# Altium PCB PCB1.PcbDoc
Units mil, origin at the board's own origin, x right, y up, seen from the top; angles counter-clockwise.
Board outline 6000 x 4000 mil, 2 copper layers (Top Layer, Bottom Layer); 10 components, 6 nets, 22 pads, 0 vias.
Unrouted connection lines stored in the file: 4.
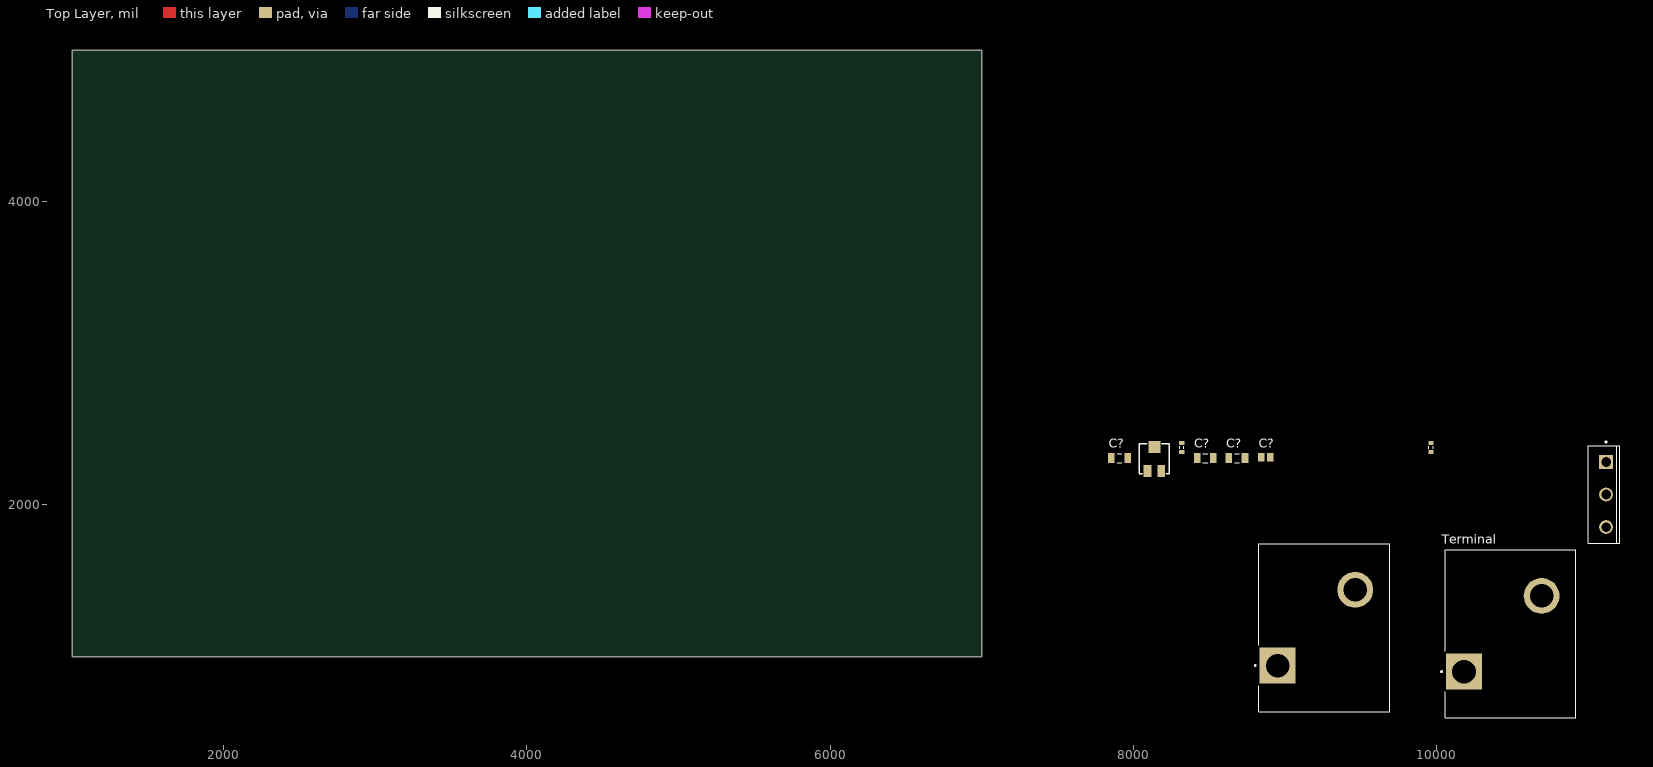
[diagram p0: Top Layer view]
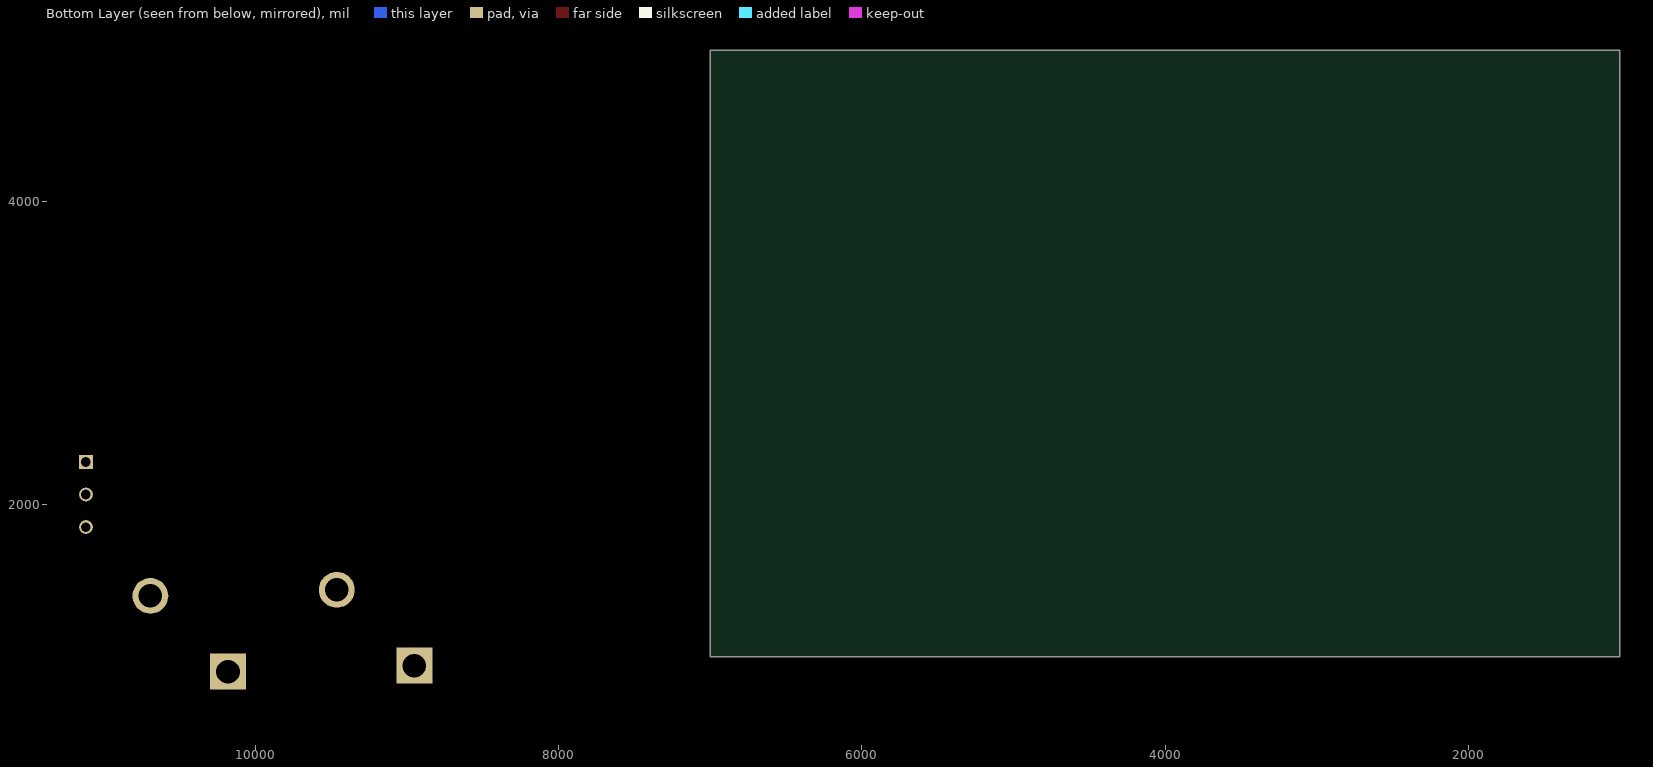
[diagram p1: Bottom Layer view, seen from below]

## Layer stack, top to bottom
Top Solder: solder mask 0.4, Solder Resist, Dk 3.5
Top Layer: signal copper 1.4
Dielectric 1: dielectric 12.6, FR-4, Dk 4.8
Bottom Layer: signal copper 1.4
Bottom Solder: solder mask 0.4, Solder Resist, Dk 3.5

## Board outline
1000,1000 7000,1000 7000,5000 1000,5000

## Design rules (kind name [scope] priority, off if disabled: settings)
Clearance [All] p1: gap=10 ignorepadtopadclearanceinfootprint=FALSE except(0: Arc-Hole Track-Hole SMDPad-Hole THPad-Hole Via-Hole Fill-Hole Poly-Hole Region-Hole Text-Hole)
PolygonConnect [All] p1: connectstyle=Relief reliefconductorwidth=10 reliefentries=4 polygonreliefangle="90 Angle" airgapwidth=10
RoomDefinition Sheet1 [InComponentClass('Sheet1')] p1: confinementstyle=ConfineIn formatcopy=TRUE lockcomponents=FALSE outline 7819.72,1213.74 11229.72,1213.74 11229.72,2453.74 7819.72,2453.74
RoutingVias [All] p1: holewidth=28 width=50 viastyle="Through Hole" minholewidth=28 minwidth=50 maxholewidth=28 maxwidth=50
SolderMaskExpansion [All] p1: expansion=4
Width [All] p1: maxlimit=10 minlimit=10 preferedwidth=10
30 further rules are at their usual default settings.

## Components (designator, comment, footprint, x,y, rotation, side; value= is the part's Value field where it differs from the comment)
C? "Cap Pol3" C0805 8874.72,2313.74 r0 top value=100uF/50V
C? "Cap Semi" C1206 8474.72,2308.74 r0 top value=100uF
C? "Cap Semi" C1206 7909.72,2308.74 r0 top value=0.33uF
C? "Cap Semi" C1206 8684.72,2308.74 r0 top value=3300uF
Terminal "230V AC" FP-38969-0002-MFG 10490,1150 r90 top
? "2N3055" ONSC-TO-247-3-340L-02 11119.72,2068.74 r0 top
? "Output" FP-38969-0002-MFG 9260,1190 r90 top
? "5K POT" POT4MM-2 8139.72,2303.74 r90 top
? "" J1-0603 9964.72,2378.74 r90 top value=10ohm
? "" J1-0603 8319.72,2378.74 r90 top value=220ohm

## Footprints (in the part's own frame and the unit in brackets; to place one, negate y for a bottom-side part, rotate by r counter-clockwise, add the part's x,y. Pads: shape width x height; smd on the part's side, far side on the other; paste and mask are expansions set on the pad)
C0805 [mm] "Chip Capacitor, Body 2.0x1.3mm, IPC High Density"
  rect 1.1x1.4 smd: 1(-0.75,0) 2(0.75,0)
  body extent -1.1,-0.72 1.1,0.72, height 1.4
C1206 [mm] "Chip Capacitor, Body 3.2x1.6mm, IPC High Density"
  rect 1.1x1.7 smd: 1(-1.35,0) 2(1.35,0)
  silkscreen extent -0.4,-0.75 0.4,0.75, body extent -1.7,-0.9 1.7,0.9, height 1.3
FP-38969-0002-MFG [mm]
  rect 6.01x6.01 hole 3.96 paste-1000 mask+0: 1(-6.35,7.8)
  round 6.01 hole 3.96 paste-1000 mask+0: 2(6.35,-5.2)
  silkscreen extent -14.1,-10.95 14.1,11.67, body extent -14.2,-11.05 14.2,11.05, height 0.25
J1-0603 [mm] "Chip Resistor, Body 1.6x0.8mm, IPC High Density"
  rect 0.7x0.9 smd: 1(-0.75,0) 2(0.75,0)
  silkscreen extent -0.2,-0.35 0.2,0.35, body extent -0.85,-0.48 0.85,0.48, height 0.9
ONSC-TO-247-3-340L-02 [mm] "FM, 3-Leads, Body 16.3x5.3mm, Pitch 5.45mm"
  rect 2.3x2.3 hole 1.6: 1(0,5.45)
  round 2.3 hole 1.6: 2(0,0) 3(0,-5.45)
  silkscreen extent -3,-8.15 2.3,8.92, body extent -3,-8.15 2.3,8.15, height 25.58
POT4MM-2 [mm] "Square Trimming Potentiometer"
  rect 2x1.3 smd: CCW(-2,-1.15) CW(-2,1.15)
  rect 2x2 smd: W(2,0)
  silkscreen extent -2.5,-2.5 2.5,2.5

## Part data
C?: "Polarized Capacitor (Surface Mount)", LatestRevisionDate=29-May-2009, LatestRevisionNote="IPC-7351 Footprint Added.", PackageDescription="Chip Capacitor", PackageReference=C0805, Published=8-Jun-2000, Publisher="Altium Limited"
C? C? C?: "Capacitor (Semiconductor SIM Model)", LatestRevisionDate=29-May-2009, LatestRevisionNote="IPC-7351 Footprint Added.", PackageDescription="Chip Capacitor", PackageReference=C1206, Published=8-Jun-2000, Publisher="Altium Limited"
Terminal ?: library part CMP-00257-12872391-1, "38969-0002 12.70mm Pitch, Single Row Tri-Barrier Terminal Strip, without Mounting Ends, 2 Circuits", Current Rating=50A, Manufacturer Lifecycle Status=ACTIVE, Max Operating Temperature=120°C, Max Voltage Rating (AC)=600V, Min Operating Temperature=-40°C, Connector Type="Terminal Block", Contact Material=Brass, Contact Plating=Tin, Country of Origin=US, Lifecycle Status=Production, Mount="Through Hole", NexarPartId=12872391, Number of Circuits=2, Number of Contacts=2, Number of Positions=2, Number of Rows=1, Orientation=Vertical, Pitch=12.7mm, REACH SVHC=Unknown, RoHS=Compliant, Termination=Screw, Voltage Rating=600V, Wire/Cable Gauge=18AWG, Wire Gauge (Max)=8AWG, Wire Gauge (Min)=20AWG
?: library part CMP-1048-01311-1, "Complementary Silicon High-Power Transistor, 3-Pin TO-247, Pb-Free, Tube", Manufacturer="On Semiconductor", PartNumber=TIP36AG, ComponentLink1Description="Manufacturer URL", ComponentLink1URL=http://www.onsemi.com/, ComponentLink2Description=Datasheet, ComponentLink2URL=http://www.onsemi.com/pub_link/Collateral/TIP35A-D.PDF, ComponentLink3Description="Package Specification", ComponentLink3URL=http://www.onsemi.cn/pub_link/Collateral/340L-02.PDF, DatasheetVersion="Rev. 6", fT Min (MHz)=3, IC Continuous (A)=25, Mounting Technology="Through Hole", PackageDescription="3-Pin Flange Mount, Vertical Straight Lead, Body 16.005 x 5 mm, Pitch 5.45 mm", PackageReference=TO-247-3-340L-02, PackageVersion="Rev. F, 10/2011", Packing=Tube, Polarity=PNP, RoHS=TRUE
?: library part "RPot SM", "Square Trimming Potentiometer", ComponentLink1Description="Manufacturer Link", ComponentLink1URL=http://bourns.com/2/search.html, DatasheetVersion=Oct-2003, PackageDescription="Square Trimming Potentiometer", PackageReference=POT4MM-2, Published=17-Dec-2003, Publisher="Altium Limited"
? ?: library part Res3, "Resistor", LatestRevisionDate=29-May-2009, LatestRevisionNote="IPC-7351 Footprint Added.", PackageDescription="Chip Resistor", PackageReference=J1-0603, Published=8-Jun-2000, Publisher="Altium Limited"

## Nets (pads, with @x,y where several pads share a name; then routed paths per layer and width w, separated by ;. In a path a pad name is that pad's centre, name@x,y a point inside that pad or via, vN(x,y) a via of type N, cw(c..) or ccw(c..) an arc to the next point about the centre after c; other vN are vias at no path point)
Net5-10A_1: Terminal.1
Net5-10A_5: Terminal.2
Net_1: ?.1@9964.72,2349.21 ?.1@11119.72,2283.31 ?.2@8319.72,2408.27
Net_2: ?.2@11119.72,2068.74 C?.1@7856.57,2308.74 C?.1@8631.57,2308.74
Net_3: ?.3
Net_4: 
pads on no net: ?.1@8319.72,2349.21 ?.1@8952.91,940 ?.2@9464.72,1440 ?.2@9964.72,2408.27 ?.CCW ?.CW ?.W C?.1@8421.57,2308.74 C?.1@8845.2,2313.74 C?.2